# EAGLE board Large_SewableLED_SMD (EAGLE 9.6.2)
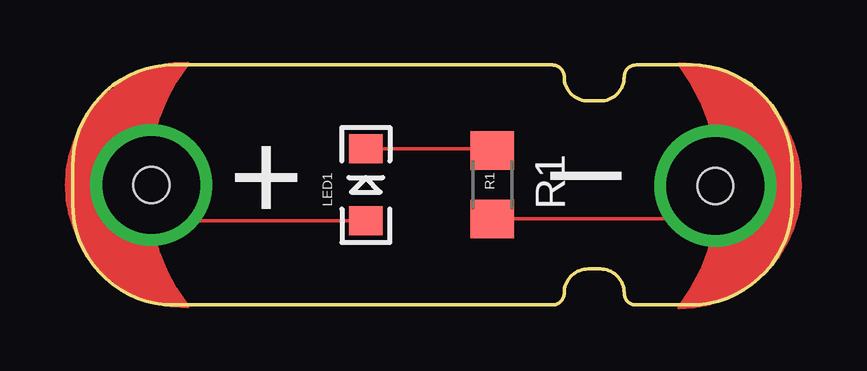
[diagram p0: board, top side]
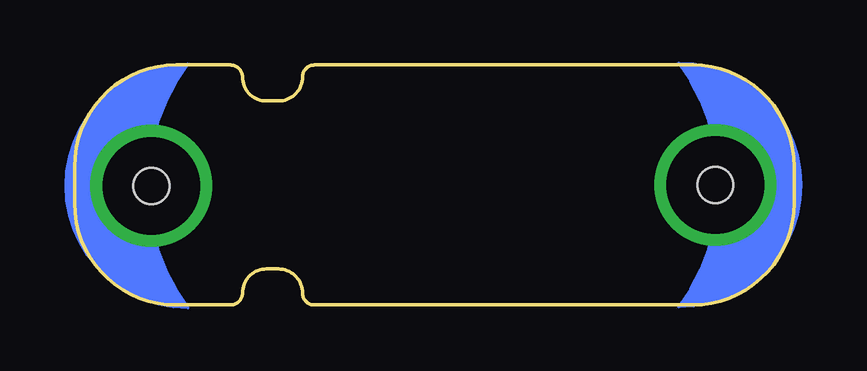
[diagram p1: board, bottom side, seen from below]

Size 30 x 10 mm. Coordinates in mm from the lower left corner, seen from the top.
Outline: 0,4.23 0,5.77 arc-90 4.23,10 20,10 arc-90 20.5,9.5 arc90 21.5,8.5 22,8.5 arc90 23,9.5 arc-90 23.5,10 25.77,10 arc-90 30,5.77 30,4.23 arc-90 25.77,0 23.5,0 arc-90 23,0.5 arc90 22,1.5 21.5,1.5 arc90 20.5,0.5 arc-90 20,0 4.23,0 arc-90 0,4.23
Copper layers (1*16): Top 0.035mm / dielectric 1.5mm / Bottom 0.035mm
Design rules "default": minimum track width 6mil, minimum drill 0.35mm, track to track 6mil, track to pad 6mil, pad to pad 6mil, via to via 6mil, smd to smd 6mil, copper to edge 40mil, drill to drill 6mil, minimum pad ring 10mil, minimum via ring 8mil, stop-mask expansion 4mil, vias tented up to drill 0mil, thermal gap 10mil

## Footprints (pad centres in the part's own frame; a part is rotated, then mirrored left to right if it is on the bottom)
LED-1206 = smd 1.2 x 1.4: A -1.5,0; C 1.5,0
PETAL-LARGE-2SIDE = drill 4.064: 1 0,2.286 | hole 1.5: 0,2.286
R1206 = smd 1.6 x 1.803: 1 -1.422,0; 2 1.422,0

## Placement (x,y rotation side)
LED1  WHITE  [LED-1206]  12.23,5 90 top
LED+  SEWTAP_LARGE-2SIDE  [PETAL-LARGE-2SIDE]  1,5 270 top
LED-  SEWTAP_LARGE-2SIDE  [PETAL-LARGE-2SIDE]  29.09,4.96 90 top
R1  150  [R1206]  17.5,5.01 270 top

## Library data of the parts
LED1 = SparkFun-LED; PROD_ID: DIO-09955
LED+ LED- = LilyPad-Large
R1 = rcl; SPICEPREFIX: R

## Nets
N$1: LED1.A LED+.1
N$2: LED1.C R1.1
N$3: LED-.1 R1.2

## Tracks (layer width: path | path; a pad name or v marks a point on that pad's centre or on a via)
N$1
  Top 0.152: LED+.1 4.78,3.5 LED1.A
N$2
  Top 0.152: LED1.C 17.43,6.5 R1.1
N$3
  Top 0.152: LED-.1 25.42,3.59 R1.2

## Text on the board
_tsilk: – | +
_tNames: R1